# Altium PCB IPM Circuit.PcbDoc
Units mm, origin at the board's own origin, x right, y up, seen from the top; angles counter-clockwise.
Board outline 90 x 77 mm, 2 copper layers (Top Layer, Bottom Layer), stack 1.1 mm thick; 43 components, 31 nets, 120 pads, 99 vias.
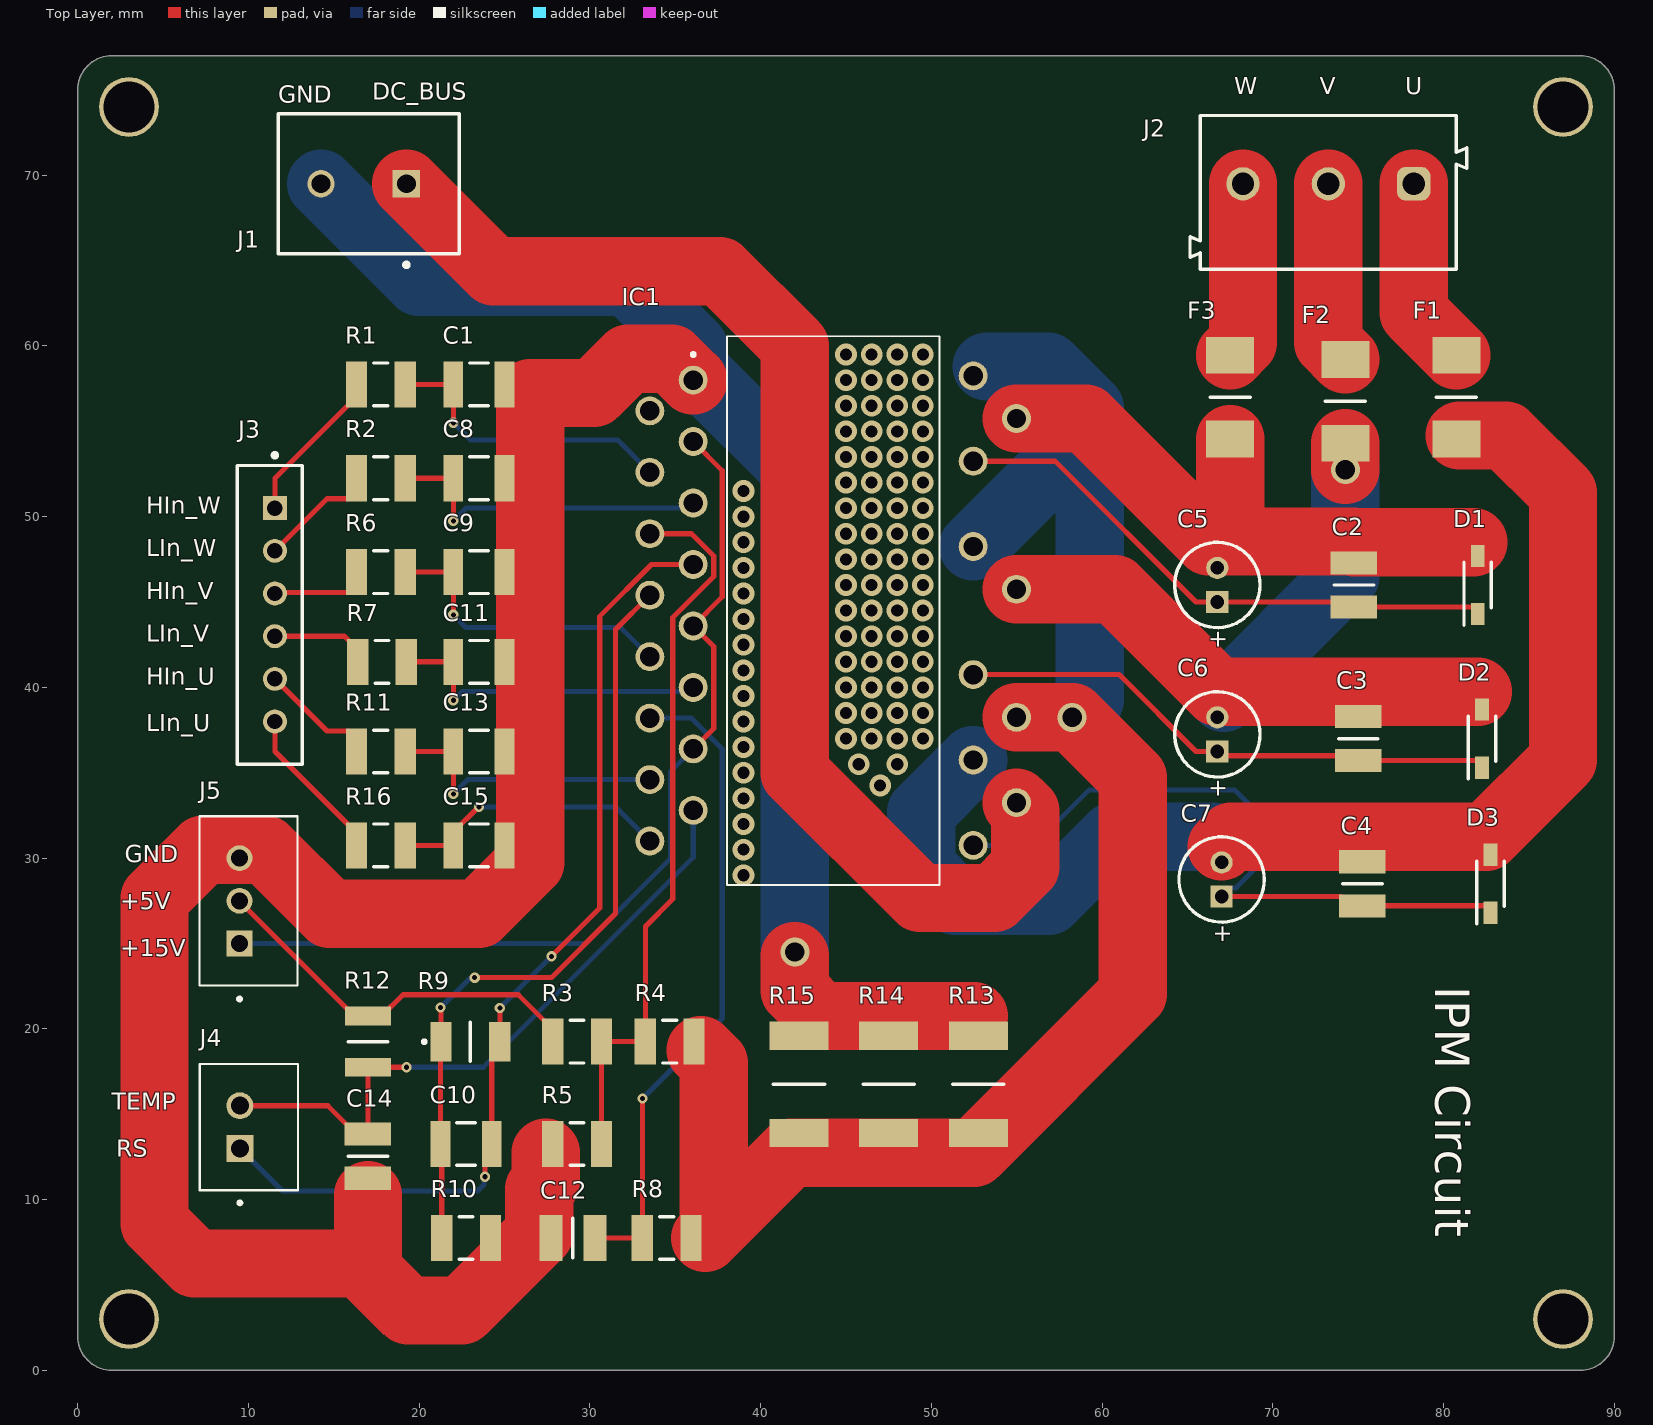
[diagram p0: Top Layer view]
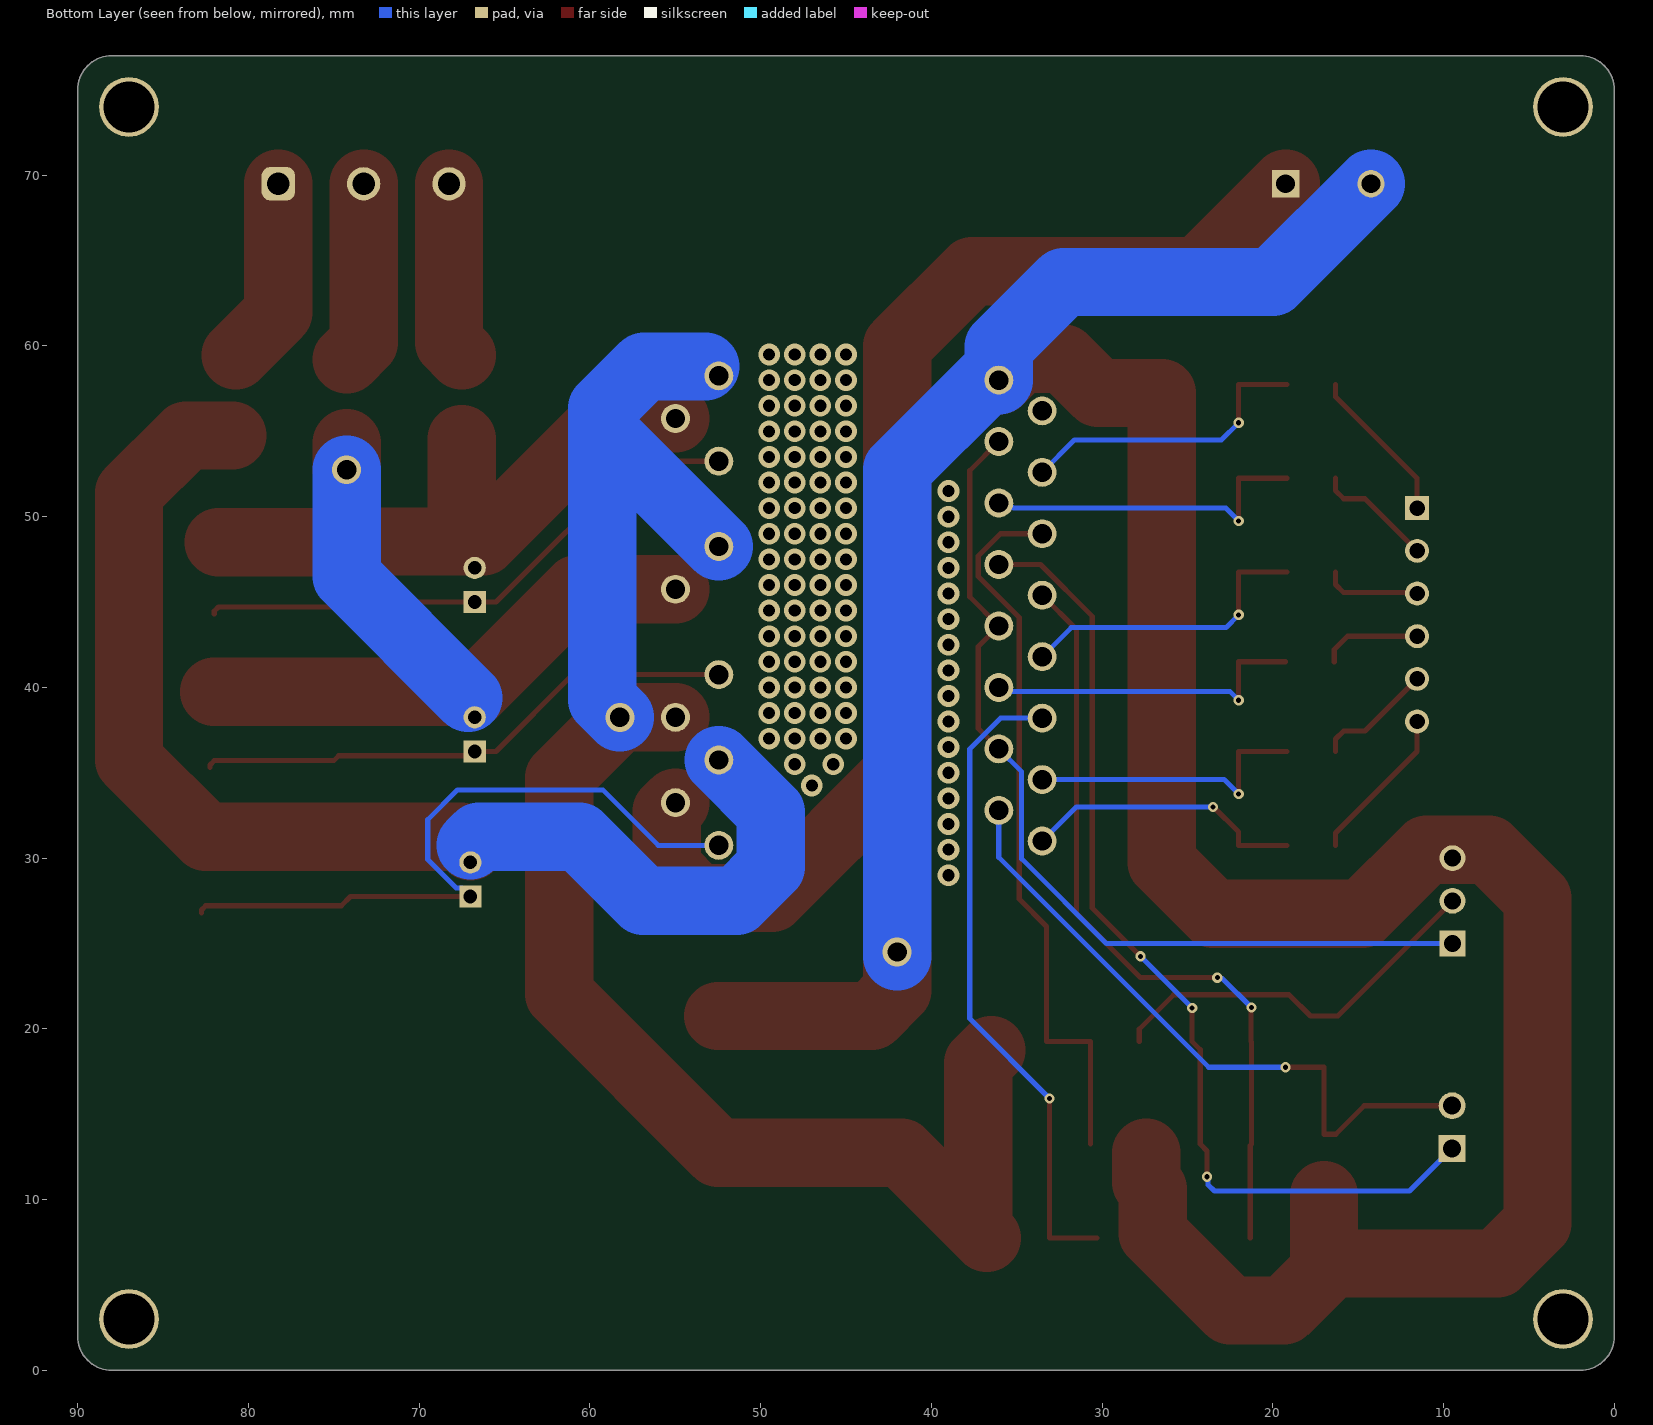
[diagram p1: Bottom Layer view, seen from below]
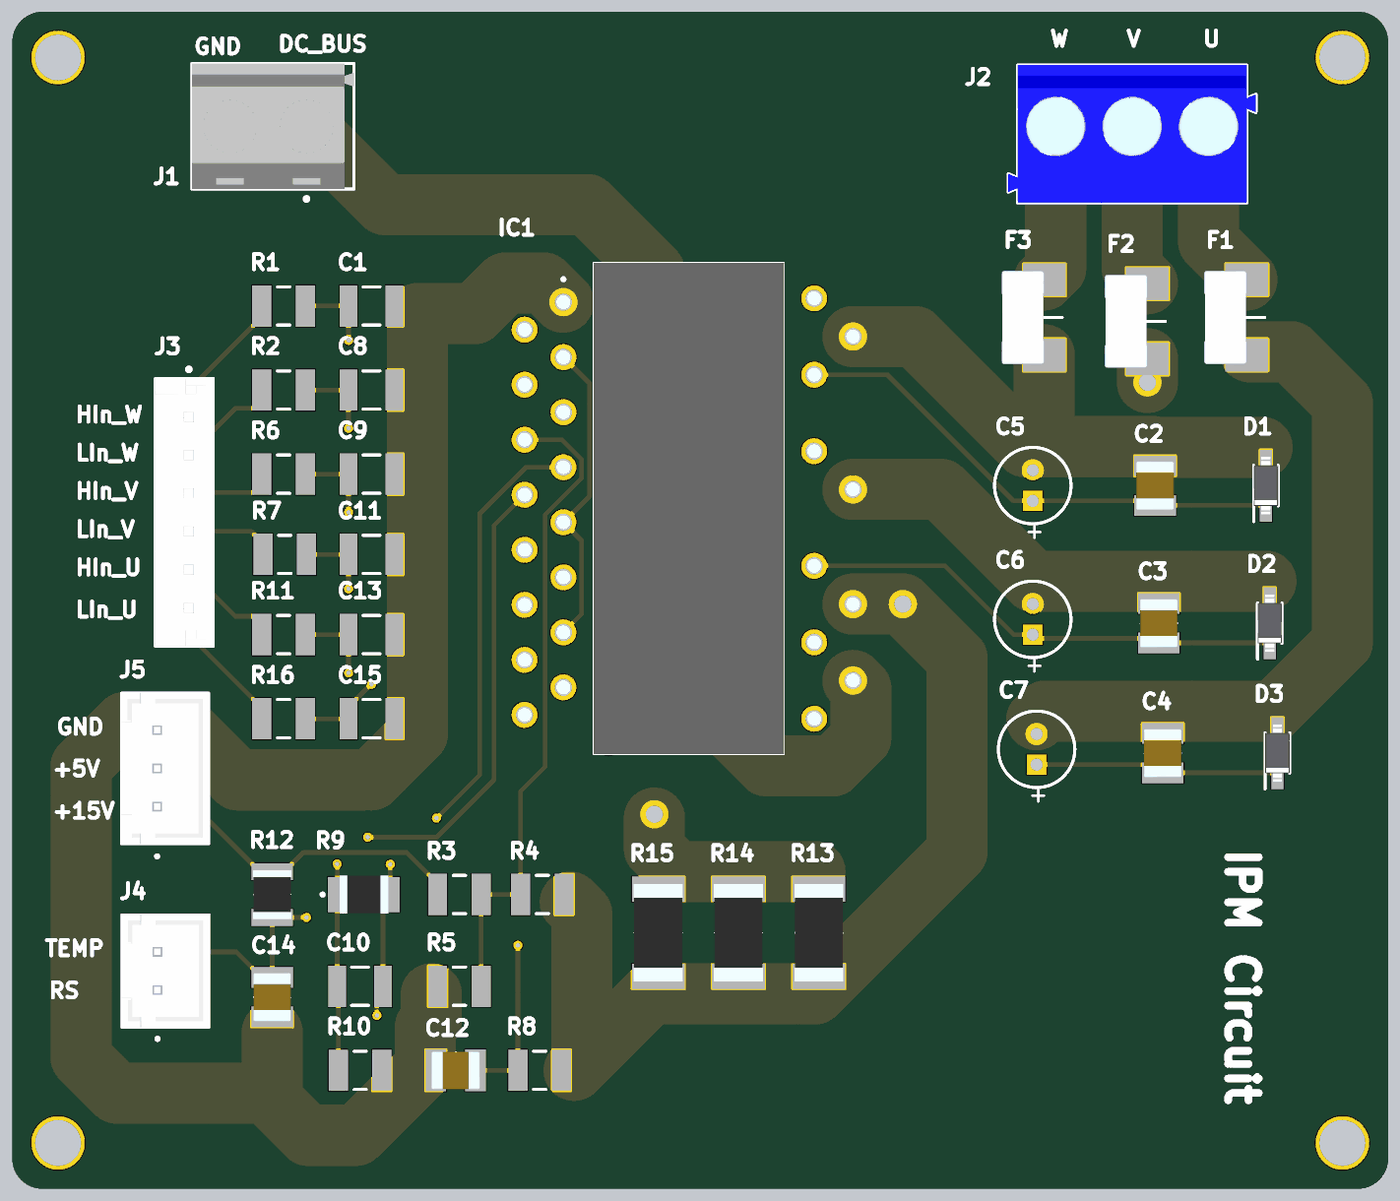
[diagram p2: 3D render of the assembled board from above, using the file's embedded part models]

## Layer stack, top to bottom
Top Solder: solder mask 0.05, Solder Resist, Dk 3.5
Top Layer: signal copper 0.1
Dielectric 1: dielectric 0.9, FR-4, Dk 4.8
Bottom Layer: signal copper 0.1
Bottom Solder: solder mask 0.05, Solder Resist, Dk 3.5

## Board outline
0,2 0,75 cw(c2,75) 2,77 88,77 cw(c88,75) 90,75 90,2 cw(c88,2) 88,0 2,0 cw(c2,2)

## Design rules (kind name [scope] priority, off if disabled: settings)
BoardOutlineClearance [All] p1: gap=0.2 ignorepadtopadclearanceinfootprint=FALSE
Clearance [All] p1: gap=0.203 ignorepadtopadclearanceinfootprint=FALSE except(0.25: Arc-Hole Track-Hole SMDPad-Hole THPad-Hole Via-Hole Fill-Hole Poly-Hole Region-Hole Text-Hole)
ComponentClearance [All] p1: gap=0.127 collisioncheckmode=3 verticalgap=0.127 showdistances=TRUE
DiffPairsRouting [All] p1: maxlimit=0.381 minlimit=0.203 mostfreqgap=0.203 toplayer_minwidth=0.203 toplayer_maxwidth=25.4 toplayer_prefwidth=0.203 bottomlayer_minwidth=0.203 bottomlayer_maxwidth=25.4 bottomlayer_prefwidth=0.203 maxuncoupledlength=12.7
Height [All] p1: minheight=0 maxheight=1816.048 prefheight=12.7
HoleSize [All] p1: absolutevalues=TRUE maxlimit=6.3 minlimit=0.3 maxpercent=80.000 minpercent=20.000
HoleToHoleClearance [All] p1: gap=0.25 allowstackedmicrovias=FALSE
MinimumAnnularRing [All] p1: minimumring=0.076
MinimumSolderMaskSliver [All] p1: minsoldermaskwidth=0
PlaneClearance [All] p1: clearance=0.203
PlaneConnect PlaneConnectPowerPads [InPadClass('PowerPads')] p1: planeconnectstyle=Direct reliefexpansion=0.508 reliefentries=4 reliefconductorwidth=0.254 reliefairgap=0.254
PlaneConnect [All] p2: pad.planeconnectstyle=Relief pad.reliefexpansion=0.3 pad.reliefentries=4 pad.reliefconductorwidth=0.203 pad.reliefairgap=0.203 via.planeconnectstyle=Direct via.reliefexpansion=0.3 via.reliefentries=4 via.reliefconductorwidth=0.127 via.reliefairgap=0.127
PolygonConnect PolygonConnectPowerPads [All vs (InPadClass('PowerPads'))] p1: connectstyle=Direct reliefconductorwidth=0.254 reliefentries=4 polygonreliefangle="90 Angle" airgapwidth=0.254
PolygonConnect [All] p2: thpad.connectstyle=Relief thpad.reliefconductorwidth=0.203 thpad.reliefentries=4 thpad.polygonreliefangle="90 Angle" thpad.airgapwidth=0.203 smdpad.connectstyle=Relief smdpad.reliefconductorwidth=0.203 smdpad.reliefentries=4 smdpad.polygonreliefangle="90 Angle" smdpad.airgapwidth=0.203 via.connectstyle=Direct via.reliefconductorwidth=0.127 via.reliefentries=4 via.polygonreliefangle="90 Angle" via.airgapwidth=0.127
RoutingVias [All] p1: holewidth=0.3 width=0.6 viastyle="Through Hole" minholewidth=0.3 minwidth=0.6 maxholewidth=1.5 maxwidth=6.6
SilkToSilkClearance [All] p1: silktosilkclearance=0
SilkToSolderMaskClearance [IsPad] p1: minsilkscreentomaskgap=0.127 clearancetoexposedcopper=TRUE
SolderMaskExpansion [All] p1: expansion=0.075 istentingtop=FALSE
Width [All] p1: maxlimit=4 minlimit=0.3 preferedwidth=0.3
20 further rules are at their usual default settings.

## Components (designator, comment, footprint, x,y, rotation, side; value= is the part's Value field where it differs from the comment)
C1 "33pF/25V" CAPC1210(3225)100_N 23.5,57.75 r0 top value=33pF
C2 "100nF/25V" CAPC3225X105N 74.75,46 r270 top
C3 "100nF/25V" CAPC3225X105N 75,37 r270 top
C4 "100nF/25V" CAPC3225X105N 75.25,28.5 r270 top
C5 "2.2uF/25V" CAPPR55-200-1100X500X1200 66.75,46 r90 top
C6 "2.2uF/25V" CAPPR55-200-1100X500X1200 66.75,37.25 r90 top
C7 "2.2uF/25V" CAPPR55-200-1100X500X1200 67,28.75 r90 top
C8 "33pF/25V" CAPC1210(3225)100_N 23.5,52.25 r0 top value=33pF
C9 "33pF/25V" CAPC1210(3225)100_N 23.5,46.75 r0 top value=33pF
C10 "33pF/25V" CAPC1210(3225)100_N 22.75,13.25 r180 top value=33pF
C11 "33pF/25V" CAPC1210(3225)100_N 23.5,41.5 r0 top value=33pF
C12 "1nF/25V" CAPC3225X105N 29,7.75 r0 top
C13 "33pF/25V" CAPC1210(3225)100_N 23.5,36.25 r0 top value=33pF
C14 "1nF/25V" CAPC3225X105N 17,12.54 r90 top
C15 "33pF/25V" CAPC1210(3225)100_N 23.5,30.75 r0 top value=33pF
D1 "MMSZ5248B" SOD3816X135N 82,46 r90 top
D2 "MMSZ5248B" SOD3816X135N 82.25,37 r90 top
D3 "MMSZ5248B" SOD3816X135N 82.75,28.5 r90 top
F1 "0679H8000-05" FUSC6125X279N 80.75,57 r90 top
F2 "0679H8000-05" FUSC6125X279N 74.25,56.75 r90 top
F3 "0679H8000-05" FUSC6125X279N 67.5,57 r90 top
IC1 "STGIPQ8C60T-HZ" STGIPQ5C60THZS 44.25,44.5 r270 top
J1 "282836-2" TECO-282836-2_V 16.75,69.5 r180 top
J2 "691101710003" 691101710003 73.25,69 r180 top
J3 "B6B-EH-A(LF)(SN)" FP-B6B-EH-A_LF_SN-MFG 11.25,44.25 r270 top
J4 "B2B-XH-A_(LF)(SN)" JST_B2B-XH-A_(LF)(SN) 10.025,14.25 r270 top
J5 "B3B-XH-A_(LF)(SN)" "JST_B3B-XH-A (LF)(SN)" 10,27.5 r270 top
R1 "3.3k" RESC3225X70X50NL20T20 17.75,57.75 r180 top
R2 "3.3k" RESC3225X70X50NL20T20 17.75,52.25 r180 top
R3 "3.3k" RESC3225X70X50NL20T20 29.25,19.25 r0 top
R4 "3.3k" RESC3225X70X50NL20T20 34.675,19.25 r0 top
R5 "3.3k" RESC3225X70X50NL20T20 29.25,13.25 r180 top
R6 "3.3k" RESC3225X70X50NL20T20 17.75,46.75 r180 top
R7 "3.3k" RESC3225X70X50NL20T20 17.825,41.5 r180 top
R8 "3.3k" RESC3225X70X50NL20T20 34.5,7.75 r0 top
R9 "10k" ERJ14BQF1R0U 23,19.25 r0 top
R10 "3.3k" RESC3225X70X50NL20T20 22.75,7.75 r0 top
R11 "3.3k" RESC3225X70X50NL20T20 17.75,36.25 r180 top
R12 "2.2k" RESC3225X60N 17,19.25 r90 top
R13 "200m" RESC6432X90N 52.75,16.75 r270 top
R14 "200m" RESC6432X90N 47.5,16.75 r270 top
R15 "200m" RESC6432X90N 42.25,16.75 r270 top
R16 "3.3k" RESC3225X70X50NL20T20 17.75,30.75 r180 top

## Footprints (in the part's own frame and the unit in brackets; to place one, negate y for a bottom-side part, rotate by r counter-clockwise, add the part's x,y. Pads: shape width x height; smd on the part's side, far side on the other; paste and mask are expansions set on the pad)
691101710003 [mm] "5,00mm - modular - blue - Horizontal entry with pressure clamp - 12,6mm height - 03p"
  rrect50% 1.95x1.95 hole 1.3: 1(-5,-0.5)
  round 1.95 hole 1.3: 2(0,-0.5) 3(5,-0.5)
  silkscreen extent -8.1,-4.5 8.1,4.5, body extent -8.1,-4.5 8.1,4.5, height 12.65
CAPC1210(3225)100_N [mm] "Chip Capacitor, Body 3.2x2.5mm, Height 1mm, IPC Medium Density"
  rect 1.15x2.7 smd: 1(-1.5,0) 2(1.5,0)
  silkscreen extent -0.55,-1.25 0.55,1.25, body extent -1.7,-1.35 1.7,1.35, height 1
CAPC3225X105N [mm]
  rect 1.35x2.72 smd: 1(-1.29,0) 2(1.29,0)
  silkscreen extent 0,-1.15 0,1.15, body extent -1.6,-1.25 1.6,1.25, height 1.05
CAPPR55-200-1100X500X1200 [mm] "THD, 2-Leads, Dia 5mm, Body Length 11mm"
  rect 1.3x1.3 hole 0.8: 1(-1,0)
  round 1.3 hole 0.8: 2(1,0)
  silkscreen extent -2.5,-2.5 2.5,2.5, body extent -2.5,-2.5 2.5,2.5, height 12
ERJ14BQF1R0U [mm]
  rect 1.25x2.3 smd: 1(-1.725,0) 2(1.725,0)
  silkscreen extent -2.8,-1.15 0,1.15, body extent -1.6,-1.25 1.6,1.25, height 0.6
FP-B6B-EH-A_LF_SN-MFG [mm]
  rect 1.4x1.4 hole 0.9 paste-1000 mask+0: 1(-6.25,0.3)
  round 1.4 hole 0.9 paste-1000 mask+0: 2(-3.75,0.3) 3(-1.25,0.3) 4(1.25,0.3) 5(3.75,0.3) 6(6.25,0.3)
  silkscreen extent -9.47,-1.9 8.75,1.9, body extent -8.85,-2 8.85,2, height 0.25
FUSC6125X279N [mm]
  rect 2.15x2.8 smd: 1(-2.455,0) 2(2.455,0)
  silkscreen extent 0,-1.17 0,1.17, body extent -3.05,0 3.05,2.79, height 1.27
JST_B2B-XH-A_(LF)(SN) [mm]
  rect 1.575x1.575 / inner round 1.575 / far side rect 1.575x1.575 hole 1.05: 1(1.25,-0.525)
  round 1.575 hole 1.05: 2(-1.25,-0.525)
  silkscreen extent -3.7,-2.88 4.54,2.88, body extent -3.7,-2.88 3.7,2.88, height 7
"JST_B3B-XH-A (LF)(SN)" [mm]
  rect 1.508x1.508 / inner round 1.508 / far side rect 1.508x1.508 hole 1: 1(2.5,-0.525)
  round 1.508 hole 1: 2(0,-0.525) 3(-2.5,-0.525)
  silkscreen extent -4.95,-2.88 5.85,2.88, body extent -4.95,-2.88 4.95,2.88, height 7
RESC3225X60N [mm]
  rect 1.1x2.7 smd: 1(-1.5,0) 2(1.5,0)
  silkscreen extent 0,-1.15 0,1.15, body extent -1.6,-1.25 1.6,1.25, height 0.6
RESC3225X70X50NL20T20 [mm] "Chip Resistor, 2-Leads, Body 3.20x2.50mm, IPC Medium Density"
  rect 1.25x2.7 smd: 1(-1.425,0) 2(1.425,0)
  silkscreen extent -0.4,-1.25 0.4,1.25, body extent -1.7,-1.35 1.7,1.35, height 0.7
RESC6432X90N [mm]
  rect 1.65x3.45 smd: 1(-2.85,0) 2(2.85,0)
  silkscreen extent 0,-1.5 0,1.5, body extent -3.2,-1.6 3.2,1.6, height 0.9
SOD3816X135N [mm]
  rect 1.3x0.8 smd: 1(-1.7,0) 2(1.7,0)
  silkscreen extent -2.35,-0.8 1.33,0.8, body extent -1.88,-0.8 1.88,0.8, height 1.35
STGIPQ5C60THZS [mm]
  round 1.695 hole 1.13: 1(-13.5,-8.2) 2(-11.7,-10.74) 3(-9.9,-8.2) 4(-8.1,-10.74) 5(-6.3,-8.2) 6(-4.5,-10.74) 7(-2.7,-8.2) 8(-0.9,-10.74) 9(0.9,-8.2) 10(2.7,-10.74) 11(4.5,-8.2) 12(6.3,-10.74) 13(8.1,-8.2) 14(9.9,-10.74) 15(11.7,-8.2) 16(13.5,-10.74) 17(13.75,8.2) 18(11.25,10.74) 19(8.75,8.2) 20(6.25,10.74) 21(3.75,8.2) 22(-1.25,10.74) 23(-3.75,8.2) 24(-8.75,8.2) 25(-11.25,10.74) 26(-13.75,8.2)
  silkscreen extent -16.07,-8.3 16.08,6.22, body extent -16.07,-11.2 16.08,11.2, height 5.1
TECO-282836-2_V [mm] "Female Header, Pitch 5mm, 1 x 2 Position, Height 10mm"
  rect 1.6x1.6 hole 1.1: 1(-2.5,0)
  round 1.6 hole 1.1: 2(2.5,0)
  silkscreen extent -5.6,-4.1 5,4.87, body extent -5.6,-4.1 5,4.1, height 10

## Part data
C1 C8 C9 C10 C11 C13 C15: library part CMP-1038-00096-1, "CAP 33pF 50V ±5% 1210 (3225 Metric) Thickness 1mm SMD", Case-EIA=1210, Case-Metric=3225, Rated Voltage="50 V", Tolerance=Â±5%, Max Thickness="1 mm", Technology=SMT
C2: library part 885012209015, "100nF 25V 1210 SMDCapacitor", Manufacturer_Name="Wurth Elektronik", Mouser Part Number=710-885012209015, Datasheet Link=https://katalog.we-online.com/pbs/datasheet/885012209015.pdf, Height=1.05mm, Manufacturer_Part_Number=885012209015, Mouser Price/Stock=https://www.mouser.co.uk/ProductDetail/Wurth-Elektronik/885012209015?qs=0KOYDY2FL2%252BsVC1aam9vyA%3D%3D
C3 C4 C12 C14: library part 885012209015, "1nF 25V 1210 SMDCapacitor", Manufacturer_Name="Wurth Elektronik", Mouser Part Number=710-885012209015, Datasheet Link=https://katalog.we-online.com/pbs/datasheet/885012209015.pdf, Height=1.05mm, Manufacturer_Part_Number=885012209015, Mouser Price/Stock=https://www.mouser.co.uk/ProductDetail/Wurth-Elektronik/885012209015?qs=0KOYDY2FL2%252BsVC1aam9vyA%3D%3D
C5 C6 C7: library part CMP-1665-00040-2, "Aluminum Electrolytic Capacitor, 2.2 uF, +/- 20%, 50 V, -40 to 85 degC, 2-Pin THD, RoHS, Bulk", Capacitance=2.2uF, Case/Package=Radial, Dielectric Material=Aluminium, Leakage Current=3uA, Manufacturer=Panasonic, Max Operating Temperature=85degC, Min Operating Temperature=-40degC, Package Description="2-Pin Radial Lead, Dia 5 mm, Height 12 mm", Package Quantity=200, Package Reference=CAPPR55-200-1100X500X1200, Ripple Current=20mA, Tolerance=20%, Voltage=50V, Contact Plating=Tin, Datasheet URL=https://industrial.panasonic.com/cdbs/www-data/pdf/RDF0000/ABA0000C1218.pdf, Datasheet Version="Rev. 05, 10/2016", Diameter=5mm, Dissipation Factor=0.12%, Height=11mm, Height - Seated (Max)=0.472inch, Lead Diameter=0.5mm, Lead Free=LeadFree, Lead Pitch=2mm, Lead/Base Style=Straight, Length=11mm, Life (Hours)=2000Hour, Manufacturer URL=http://www.panasonic.com/, Mount=ThroughHole, Number of Pins=2, Packaging=Bulk, Radiation Hardening=No, REACH SVHC=NoSVHC, RoHSCompliant=true, Termination=Radial, Voltage Rating=50V, Voltage Rating (DC)=50V
D1 D2 D3: library part MMSZ5248B_R1_00001, "Diode", Manufacturer_Name=PANJIT, Mouser Part Number=241-MMSZ5248BR100001, Datasheet Link=https://www.mouser.in/datasheet/2/1057/MMSZ5221B_SERIES-1865969.pdf, Height=1.35mm, Manufacturer_Part_Number=MMSZ5248B_R1_00001, Mouser Price/Stock=https://www.mouser.co.uk/ProductDetail/Panjit/MMSZ5248B_R1_00001?qs=sPbYRqrBIVm8lknYNYa9yQ%3D%3D
F1 F2 F3: "Fuse", Manufacturer_Name="Bel Circuit Protection", Arrow Part Number=0679H8000-05, Arrow Price/Stock=https://www.arrow.com/en/products/0679h8000-05/bel-group?region=nac, Datasheet Link=https://www.mouser.ec/datasheet/2/643/ds_cp_0679h_series-1290853.pdf, Height=2.79mm, Manufacturer_Part_Number=0679H8000-05
IC1: "Integrated Circuit", Manufacturer_Name=STMicroelectronics, Mouser Part Number=511-STGIPQ8C60T-HZ, Arrow Part Number=STGIPQ8C60T-HZ, Arrow Price/Stock=https://www.arrow.com/en/products/stgipq8c60t-hz/stmicroelectronics?region=nac, Datasheet Link=https://www.st.com/resource/en/datasheet/stgipq8c60t-hz.pdf, Height=5mm, Manufacturer_Part_Number=STGIPQ8C60T-HZ, Mouser Price/Stock=https://www.mouser.co.uk/ProductDetail/STMicroelectronics/STGIPQ8C60T-HZ?qs=NoqMqJKvPFK9ZD4jsoLk8w%3D%3D
J1: library part CMP-1684-00017-1, "Female Header, Pitch 5 mm, 1 x 2 Position, Height 10 mm, Tail Length 3.5 mm, Rohs, Bulk", Color=Green, Current=13.5A, Manufacturer="TE Connectivity", Package Description="Female Header, Pitch 5 mm, 1 x 2 Position, Height 10 mm, Tail Length 3.5 mm", Package Reference=THD, Standard Package=300, Voltage=300V, 3D Model=282836-2.pdf, Category=Connectors,Interconnects, Clamp Material - Plating=Brass-NickelPlated, Contact Material - Plating=Brass-TinPlated, Datasheet URL=http://www.te.com.cn/commerce/DocumentDelivery/DDEController?Action=showdoc&DocId=Catalog+Section%7F1308389_EUROSTYLE_TERMINAL_BLOCKS%7F0607%7Fpdf%7FEnglish%7FENG_CS_1308389_EUROSTYLE_TERMINAL_BLOCKS_0607.pdf%7F282836-2, Dynamic Catalog=BuchananSeries, Family=TerminalBlocks-WiretoBoard, Featured Product=EurostyleTerminalBlockConnectors, Features=Interlocking(Side), Housing Material=Polyamide(PA66),Nylon6/6, Manufacturer URL=http://www.te.com, Mating Orientation=HorizontalwithBoard, Mounting Type=ThroughHole, Number of Levels=1, Other Names="5ULV-02B / A98076", Packaging=Bulk, Pitch="0.197\"(5.00mm)", Positions Per Level=2, Product Training Modules=Wire-to-BoardEurostyleTerminalBlocks, RoHS Information=282836-2StatementofCompliance, Screw Material - Plating=Brass-NickelPlated, Screw Thread=M3, Series=Buchanan, Torque - Screw=0.68Nm(6Lb-In), Wire Gauge=16-30AWG, Wire Termination=Screw-RisingCageClamp
J2: library part CMP-1502-03257-2, Color=Blue, Current=16A, Max Operating Temperature=105°C, Min Operating Temperature=-40°C, Voltage=250V, Contact Material=Brass, Contact Plating=Tin, Current Rating=16A, Height=16.4mm, Housing Material=Nylon, Lead Pitch=5mm, Length=9mm, Mount="Through Hole", NexarPartId=8917705, Number of Contacts=3, Number of Levels=1, Number of Pins=3, Number of Positions Per Level=3, Packaging=Box, Pitch=5.0038mm, Plating=Steel, REACH SVHC=Unknown, RoHS=Compliant, Stripping Length=-7mm, Termination=Screw, Voltage Rating=250V, Width=16.2mm, Wire Gauge (Max)=26AWG, Wire Gauge (Min)=14AWG, Wire/Cable Gauge=26AWG
J3: library part CMP-17439-000293-1, "CONN HEADER VERT 6POS 2.5MM", Color=Natural, Current Rating=3A, Flammability Rating="UL94 V-0", Housing Color=White, Voltage Rating=250V, Connector Type=Header, Contact Finish - Mating=TIN, Contact Material=Brass, Contact Mating Length=0.13inch, Contact Plating=Tin, Contact Shape=Square, Contact Type="Male Pin", Fastening Type=Friction, Gender=Male, Insulation Color=Natural, Insulation Material=Nylon, Lead Free="Lead Free", Mated Stacking Heights=8.1mm, Mount="Through Hole", Number of Contacts=6, Number of Positions=6, Number of Rows=1, Orientation=Straight, Packaging=Bulk, Pitch=2.5mm, Series=EH, Termination=Solder
J4: "Connector Header Through Hole 2 position 0.098 (2.50mm)", Package=None, Check_prices=https://www.snapeda.com/parts/B2B-XH-A%20(LF)(SN)/JST+Sales+America+Inc./view-part/?ref=eda, MF="JST Sales", MP="B2B-XH-A (LF)(SN)", SnapEDA_Link=https://www.snapeda.com/parts/B2B-XH-A%20(LF)(SN)/JST+Sales+America+Inc./view-part/?ref=snap
J5: "Connector Header Through Hole 3 position 0.098 (2.50mm)", Package=None, Check_prices=https://www.snapeda.com/parts/B3B-XH-A%20(LF)(SN)/JST+Sales+America+Inc./view-part/?ref=eda, MF="JST Sales America Inc.", MP="B3B-XH-A (LF)(SN)", SnapEDA_Link=https://www.snapeda.com/parts/B3B-XH-A%20(LF)(SN)/JST+Sales+America+Inc./view-part/?ref=snap
R1 R2 R3 R4 R5 R6 R7 R8 R10 R11 R16: library part CMP-2005-03838-2, "3.3k 0.5W 1210 SMD Resistor", Manufacturer=Panasonic, Part Number=ERJ-L14KF10CU
R9: library part ERJ-14NF1002U, "10k 0.5W 1210 SMD Resistor", Manufacturer_Name=Panasonic, Mouser Part Number=667-ERJ-14NF1002U, Arrow Part Number=ERJ-14NF1002U, Arrow Price/Stock=https://www.arrow.com/en/products/erj-14nf1002u/panasonic?region=nac, Datasheet Link=https://industrial.panasonic.com/cdbs/www-data/pdf/RDA0000/AOA0000C84.pdf, Height=0.7mm, Manufacturer_Part_Number=ERJ-14NF1002U, Mouser Price/Stock=https://www.mouser.co.uk/ProductDetail/Panasonic/ERJ-14NF1002U?qs=DQ1bOpn7xPCpWa2jtZ42Rg%3D%3D
R12: library part CRCW12102K20JNEA, "2.2k 0.5W 1210 SMD Resistor", Manufacturer_Name=Vishay, Mouser Part Number=71-CRCW1210J-2.2K-E3, Datasheet Link=http://componentsearchengine.com/Datasheets/1/CRCW12102K20JNEA.pdf, Height=0.6mm, Manufacturer_Part_Number=CRCW12102K20JNEA, Mouser Price/Stock=https://www.mouser.co.uk/ProductDetail/Vishay-Dale/CRCW12102K20JNEA?qs=u0pLYIWDdLe6Vz%252BoOoKxpA%3D%3D
R13 R14 R15: library part TLRP3A30CR200FTE, "0.2Ohm 3W 2512 SMD Resistor", Manufacturer_Name="TE Connectivity", Mouser Part Number=279-TLRP3A30CR200FTE, Arrow Part Number=TLRP3A30CR200FTE, Arrow Price/Stock=https://www.arrow.com/en/products/tlrp3a30cr200fte/te-connectivity?region=nac, Datasheet Link=https://www.te.com/commerce/DocumentDelivery/DDEController?Action=srchrtrv&DocNm=1773449-4&DocType=Data%20Sheet&DocLang=English&PartCntxt=4-2176422-6&DocFormat=pdf, Height=0.9mm, Manufacturer_Part_Number=TLRP3A30CR200FTE, Mouser Price/Stock=https://www.mouser.co.uk/ProductDetail/TE-Connectivity-Holsworthy/TLRP3A30CR200FTE?qs=QNEnbhJQKvbU4hSlZCsDtQ%3D%3D

## Free pads (board coordinates)
  round 3.5 hole 3: 5(3,3) 5(3,74) 5(87,3) 5(87,74)

## Via types
v1: diameter 1.27, hole 0.711, Top Layer to Bottom Layer, 83 vias
v2: diameter 0.6, hole 0.3, Top Layer to Bottom Layer, 13 vias
v3: diameter 1.695, hole 1.13, Top Layer to Bottom Layer, 3 vias

## Nets (pads, with @x,y where several pads share a name; then routed paths per layer and width w, separated by ;. In a path a pad name is that pad's centre, name@x,y a point inside that pad or via, vN(x,y) a via of type N, cw(c..) or ccw(c..) an arc to the next point about the centre after c; other vN are vias at no path point)
+5V: J5.2 R3.1 R12.2 | length 23.2
  Top Layer w0.3: J5.2 9.475,27.475 16.2,20.75 17.8,20.75 19.05,22 25.8,22 27.825,19.975 R3.1
+15V: IC1.3 IC1.9 IC1.13 J5.1 | length 54.7
  Top Layer w0.3: IC1.13 37.251,37.601 37.251,42.399 IC1.9 37.754,45.304 37.754,52.696 IC1.3
  Bottom Layer w0.3: J5.1 29.75,25 34.711,29.961 34.711,35.061 IC1.13
DC_Bus: IC1.18 J1.1 | length 73
  Top Layer w4: J1.1 24.368,64.382 37.618,64.382 42,60 42,35 49.333,27.667 53.681,27.667 55.501,29.486 55.501,32.739 IC1.18
GND: C1.2 C8.2 C9.2 C11.2 C12.1 C13.2 C14.1 C15.2 IC1.1 J1.2 J5.3 R5.2 R10.2 R13.1 R14.1 R15.1 | length 195.5
  Top Layer w4: 17,10.25 17,5.843 ; 23.041,26.75 14.75,26.75 11,30.5 7.343,30.5 4.5,27.657 4.5,8.602 6.843,6.259 16.584,6.259 17,5.843 ; 23.5,26.75 26.5,29.75 26.5,41.5 26.5,57.25 30.246,57.25 32.246,59.251 34.774,59.251 36.024,58 IC1.1 ; R5.2@27.413,12.75 27.413,11 27.028,10.616 27.028,8.028 22.5,3.5 19.343,3.5 17,5.843 ; v3@42,24.25 42,22.25 43.5,20.75 52.5,20.75
  Bottom Layer w4: J1.2 20,63.75 32.25,63.75 36.05,59.95 IC1.1 ; IC1.1@36.764,58 42,52.764 v3@42,24.25
  other v3: 42,24.5
HIn_U: C13.1 IC1.14 R11.1 | length 17.2
  Top Layer w0.3: R11.1 C13.1 v2(22,33.75)
  Bottom Layer w0.3: v2(22,33.75) 22.85,34.6 IC1.14
HIn_V: C9.1 IC1.10 R6.1 | length 17.8
  Top Layer w0.3: R6.1 C9.1 v2(22,44.25)
  Bottom Layer w0.3: v2(22,44.25) 22.75,43.5 31.81,43.5 IC1.10
HIn_W: C1.1 IC1.4 R1.1 | length 17.8
  Top Layer w0.3: R1.1 C1.1 v2(22,55.5)
  Bottom Layer w0.3: v2(22,55.5) 23,54.5 31.61,54.5 IC1.4
Iso_HIn_U: J3.5 R11.2 | length 7
  Top Layer w0.3: J3.5 14.6,37.45 15.85,37.45 16.325,36.975 R11.2
Iso_HIn_V: J3.3 R6.2 | length 5.7
  Top Layer w0.3: J3.3 11.6,45.55 15.85,45.55 16.325,46.025 R6.2
Iso_HIn_W: J3.1 R1.2 | length 9.2
  Top Layer w0.3: J3.1 11.55,52.25 16.325,57.025 R1.2
Iso_LIn_U: J3.6 R16.2 | length 9.5
  Top Layer w0.3: J3.6@11.8,38 J3.6 11.55,36.25 16.325,31.475 R16.2
Iso_LIn_V: J3.4 R7.2 | length 5.9
  Top Layer w0.3: J3.4 15.625,43 16.4,42.225 R7.2
Iso_LIn_W: J3.2 R2.2 | length 7
  Top Layer w0.3: J3.2 14.6,51.05 15.85,51.05 16.325,51.525 R2.2
LIn_U: C15.1 IC1.16 R16.1 | length 16.5
  Top Layer w0.3: R16.1 C15.1 22,31.525 23.475,33 v2(23.5,33)
  Bottom Layer w0.3: v2(23.5,33) 31.51,33 IC1.16
LIn_V: C11.1 IC1.11 R7.1 | length 19.4
  Top Layer w0.3: R7.1 C11.1 v2(22,39.25)
  Bottom Layer w0.3: v2(22,39.25) 22.5,39.75 35.8,39.75 IC1.11
LIn_W: C8.1 IC1.5 R2.1 | length 19.8
  Top Layer w0.3: R2.1 C8.1 v2(22,49.75)
  Bottom Layer w0.3: v2(22,49.75) 22.75,50.5 35.177,50.5 35.21,50.533 35.783,50.533 IC1.5
N: IC1.20 IC1.23 IC1.26 R4.2 R8.2 R13.2 R14.2 R15.2 | length 97.1
  Top Layer w4: R4.2@36.5,18.75 37.25,18 37.25,9.075 ; 36.75,7.75 41.75,12.75 42.25,12.75 52.5,12.75 61.791,22.041 61.791,34.709 v3(58.25,38.25) IC1.20
  Bottom Layer w4: IC1.23 59.27,55.07 ; 53.25,58.801 56.814,58.801 59.27,56.345 59.27,55.07 ; v3(58.25,38.25) 59.27,39.27 59.27,55.07
NetC10_2: C10.2 IC1.8 R9.1 R10.1 | length 45.6
  Top Layer w0.3: v2(21.25,21.25) 21.275,21.225 R9.1 21.25,19.225 C10.2 21.325,13.175 R10.1 ; v2(23.25,23) 27.75,23 31.5,26.75 31.5,43.39 IC1.8
  Bottom Layer w0.3: v2(21.25,21.25) 22.943,22.943 23.193,22.943 v2(23.25,23)
NetC12_2: C12.2 IC1.12 R8.1 | length 38.4
  Top Layer w0.3: C12.2 R8.1 v2(33.075,15.925)
  Bottom Layer w0.3: v2(33.075,15.925) 37.754,20.604 37.754,36.394 35.948,38.2 IC1.12
NetF1_2: F1.2 J2.1 | length 11.1
  Top Layer w4: J2.1 78.25,61.955 F1.2
NetF2_2: F2.2 J2.2 | length 10.7
  Top Layer w4: J2.2 73.25,60.205 F2.2
NetF3_2: F3.2 J2.3 | length 10.4
  Top Layer w4: F3.2 68.25,60.205 J2.3
NetIC1_6: IC1.6 R3.2 R4.1 R5.1 | length 43
  Top Layer w0.3: R5.1 R3.2 R4.1 33.25,26 34.849,27.599 34.849,44.097 37.251,46.499 37.251,47.697 35.948,49 IC1.6
OUT_U: C4.1 C7.2 D3.2 F1.1 IC1.19 | length 72.9
  Top Layer w4: 67,30.688 67.562,31.25 75.25,31.25 82.5,31.25 87,35.75 87,51.405 83.655,54.75 F1.1@80.955,54.75
  Bottom Layer w4: IC1.19 49.399,32.699 49.399,29.486 51.386,27.5 56.869,27.5 60.619,31.25 66.5,31.25 67,30.75
OUT_V: C3.1 C6.2 D2.2 F2.1 IC1.22 | length 47.4
  Top Layer w4: IC1.22 60.75,45.75 66.75,39.75 82,39.75 ; v3(74.25,52.75) F2.1
  Bottom Layer w4: 67.125,39.375 74.25,46.5 v3(74.25,52.75)
OUT_W: C2.1 C5.2 D1.2 F3.1 IC1.25 | length 36.3
  Top Layer w4: IC1.25 59.047,55.75 66.25,48.547 ; F3.1 67.5,49.797 66.25,48.547 ; 81.75,48.5 74.75,48.5 74.703,48.547 66.25,48.547
RS: C10.1 IC1.7 J4.1 R9.2 | length 58.3
  Top Layer w0.3: v2(23.853,11.342) 23.853,12.853 C10.1 24.25,18.775 R9.2 v2(24.725,21.225) ; v2(27.75,24.25) 30.576,27.076 30.576,44.164 33.612,47.2 IC1.7
  Bottom Layer w0.3: J4.1 12,10.5 23.422,10.5 23.795,10.873 23.795,11.285 v2(23.853,11.342) ; v2(24.725,21.225) v2(27.75,24.25)
TEMP: C14.2 IC1.15 J4.2 R12.1 | length 39
  Top Layer w0.3: J4.2 14.645,15.5 16.315,13.83 C14.2 R12.1 v2(19.25,17.75)
  Bottom Layer w0.3: v2(19.25,17.75) 23.75,17.75 36.05,30.05 IC1.15
Vboot_U: C4.2 C7.1 D3.1 IC1.17 | length 41.1
  Top Layer w0.3: C7.1 74.025,27.75 74.565,27.21 C4.2 82.5,27.21 82.75,26.96 D3.1
  Bottom Layer w0.3: IC1.17 56,30.75 59.25,34 67.75,34 69.5,32.25 69.5,29.922 67.828,28.25 67.5,28.25 C7.1
Vboot_V: C3.2 C6.1 D2.1 IC1.21 | length 31.8
  Top Layer w0.3: IC1.21 61,40.75 65.5,36.25 C6.1 ; C6.1@67,36 74.71,36 C3.2 82,35.71 82.25,35.46 D2.1
Vboot_W: C2.2 C5.1 D1.1 IC1.24 | length 33.4
  Top Layer w0.3: IC1.24 57.25,53.25 65.5,45 74.46,45 C2.2 81.75,44.71 82,44.46 D1.1
pads on no net: IC1.2
copper on no net:
  other v1: 39,29 39,30.5 39,32 39,33.5 47,34.25 39,35 45.75,35.5 48,35.5 39,36.5 45,37 46.5,37 48,37 49.5,37 39,38 45,38.5 46.5,38.5 48,38.5 49.5,38.5 39,39.5 45,40 46.5,40 48,40 49.5,40 39,41 45,41.5 46.5,41.5 48,41.5 49.5,41.5 39,42.5 45,43 46.5,43 48,43 49.5,43 39,44 45,44.5 46.5,44.5 48,44.5 49.5,44.5 39,45.5 45,46 46.5,46 48,46 49.5,46 39,47 45,47.5 46.5,47.5 48,47.5 49.5,47.5 39,48.5 45,49 46.5,49 48,49 49.5,49 39,50 45,50.5 46.5,50.5 48,50.5 49.5,50.5 39,51.5 45,52 46.5,52 48,52 49.5,52 45,53.5 46.5,53.5 48,53.5 49.5,53.5 45,55 46.5,55 48,55 49.5,55 45,56.5 46.5,56.5 48,56.5 49.5,56.5 45,58 46.5,58 48,58 49.5,58 45,59.5 46.5,59.5 48,59.5 49.5,59.5

## Silkscreen, mask and mechanical layers (free items; w line width, h text height)
Top Overlay:
  text "W" at 67.754,74.754 h1
  text "V" at 72.754,74.754 h1
  text "U" at 77.754,74.754 h1
  text "DC_BUS" at 17.254,74.421 h1
  text "GND" at 11.754,74.254 h1
  text "HIn_W" at 4.004,50.171 h1
  text "LIn_W" at 4.004,47.671 h1
  text "HIn_V" at 4.004,45.171 h1
  text "LIn_V" at 4.004,42.671 h1
  text "HIn_U" at 4.004,40.171 h1
  text "LIn_U" at 4.004,37.421 h1
  text "GND" at 2.754,29.754 h1
  text "+5V" at 2.504,27.004 h1
  text "+15V" at 2.504,24.254 h1
  text "IPM Circuit" at 79.5,22.5 h2 r270
  text "TEMP" at 2.004,15.254 h1
  text "RS" at 2.254,12.504 h1
Mechanical 1:
  the board outline again, w0.5

## Text inside footprints (layer, text, board x,y; h text height)
C5: Top Overlay "+" at 67.25,42.25 h1 r90
C6: Top Overlay "+" at 67.25,33.5 h1 r90
C7: Top Overlay "+" at 67.5,25 h1 r90